# EAGLE board CPC_RAM512K_SN74_v2.01 (EAGLE 6.4)
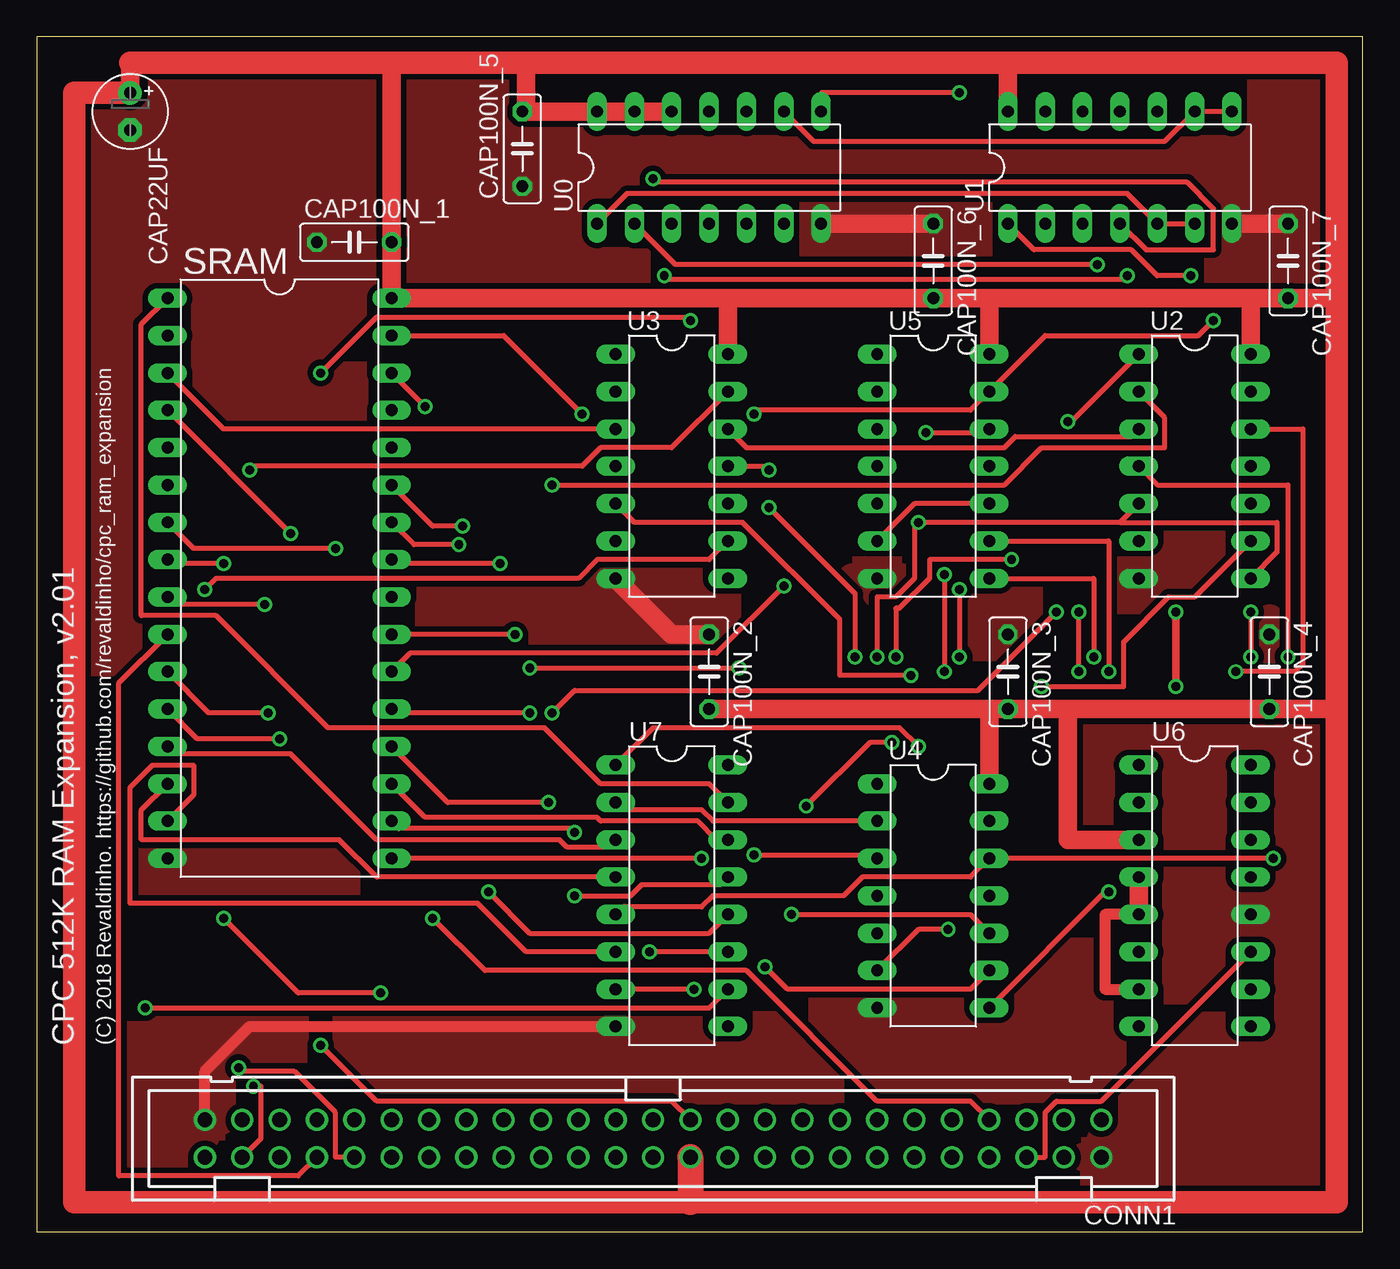
[diagram p0: board, top side]
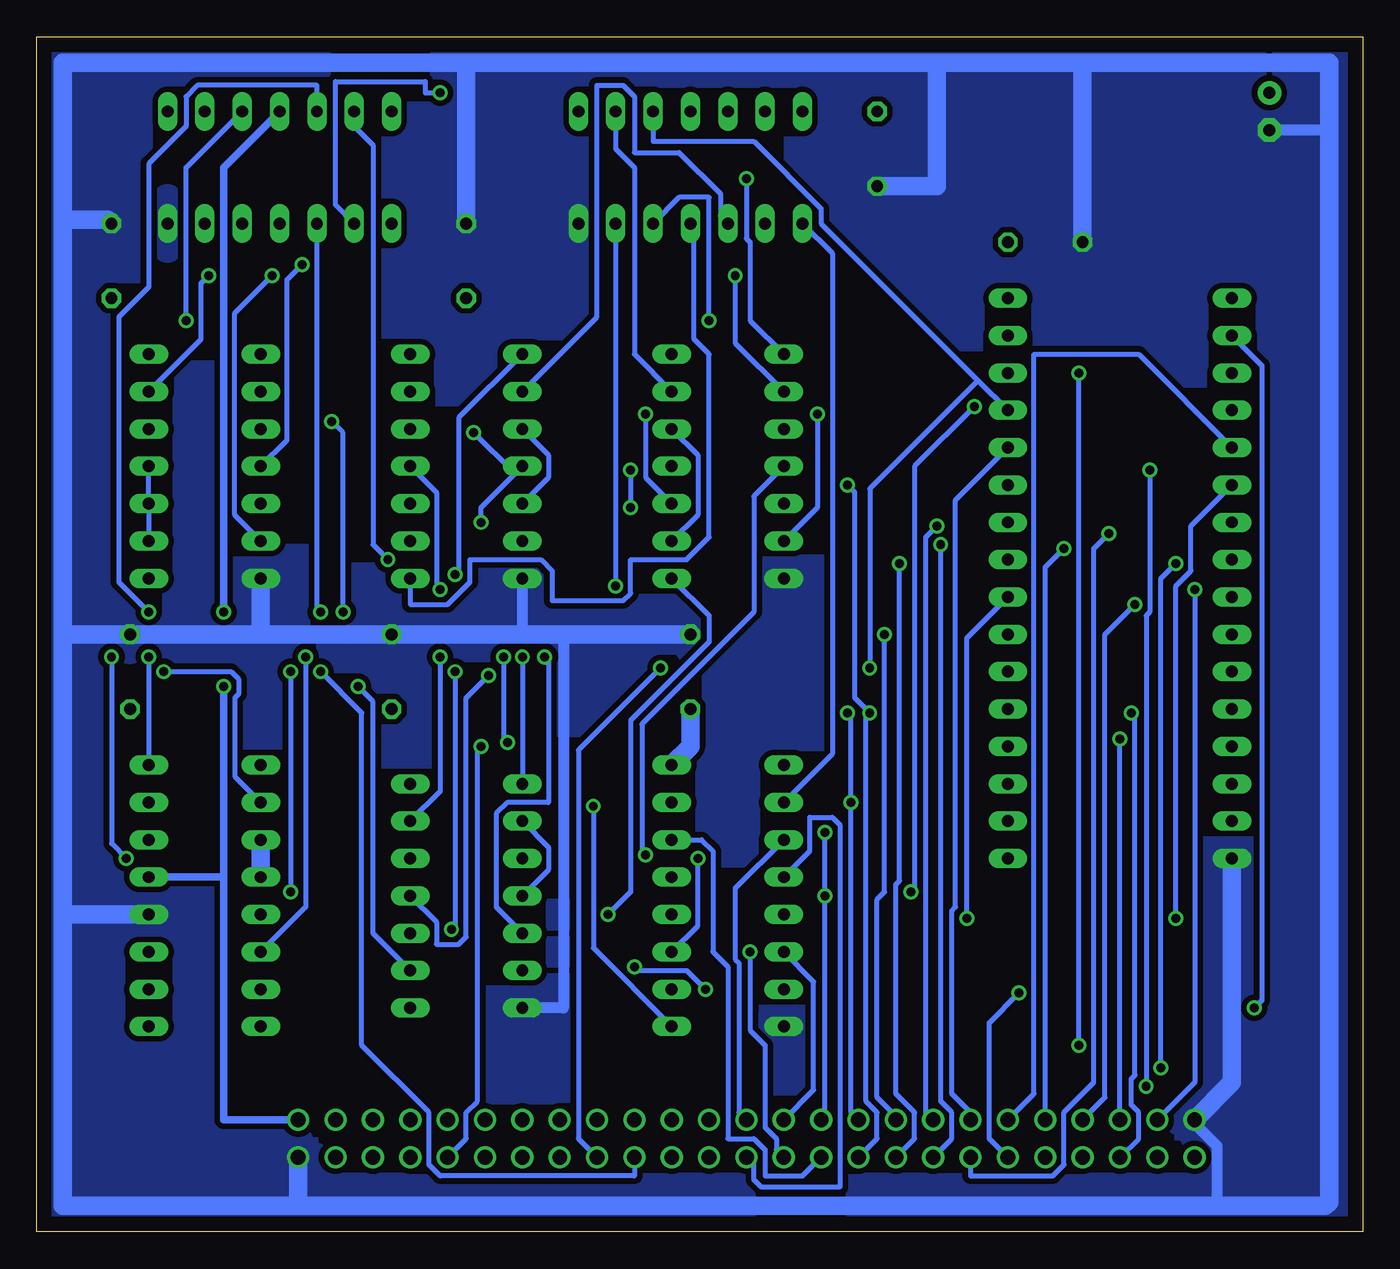
[diagram p1: board, bottom side, seen from below]

Size 90.17 x 81.28 mm. Coordinates in mm from the lower left corner, seen from the top.
Outline: 0,0 90.17,0 90.17,81.28 0,81.28 0,0
Copper layers (1*16): Top 0.035mm / dielectric 1.5mm / Bottom 0.035mm
Design rules "default": minimum track width 10mil, minimum drill 24mil, track to track 8mil, track to pad 8mil, pad to pad 8mil, via to via 8mil, smd to smd 8mil, copper to edge 40mil, drill to drill 8mil, minimum pad ring 10mil, minimum via ring 8mil, stop-mask expansion 4mil, vias tented up to drill 0mil, thermal gap 10mil
Net classes: 0 signal: width 0.356 mm, clearance 0.254 mm; 1 supply: width 0.762 mm, clearance 0.381 mm

## Footprints (pad centres in the part's own frame; a part is rotated, then mirrored left to right if it is on the bottom)
E2,5-5 = drill 0.813 pad 1.6: + -1.27,0 | drill 0.813 pad 1.6 octagon: - 1.27,0
C050-025X075 = drill 0.813 octagon: 1 -2.54,0; 2 2.54,0
PAK100/2500-50 = drill 1 pad 1.422: 1 -30.48,-1.27; 2 -30.48,1.27; 3 -27.94,-1.27; 4 -27.94,1.27; 5 -25.4,-1.27; 6 -25.4,1.27; 7 -22.86,-1.27; 8 -22.86,1.27; 9 -20.32,-1.27; 10 -20.32,1.27; 11 -17.78,-1.27; 12 -17.78,1.27; 13 -15.24,-1.27; 14 -15.24,1.27; 15 -12.7,-1.27; 16 -12.7,1.27; 17 -10.16,-1.27; 18 -10.16,1.27; 19 -7.62,-1.27; 20 -7.62,1.27; 21 -5.08,-1.27; 22 -5.08,1.27; 23 -2.54,-1.27; 24 -2.54,1.27; 25 0,-1.27; 26 0,1.27; 27 2.54,-1.27; 28 2.54,1.27; 29 5.08,-1.27; 30 5.08,1.27; 31 7.62,-1.27; 32 7.62,1.27; 33 10.16,-1.27; 34 10.16,1.27; 35 12.7,-1.27; 36 12.7,1.27; 37 15.24,-1.27; 38 15.24,1.27; 39 17.78,-1.27; 40 17.78,1.27; 41 20.32,-1.27; 42 20.32,1.27; 43 22.86,-1.27; 44 22.86,1.27; 45 25.4,-1.27; 46 25.4,1.27; 47 27.94,-1.27; 48 27.94,1.27; 49 30.48,-1.27; 50 30.48,1.27
DIL32 = drill 0.813 long: 1 -19.05,-7.62; 2 -16.51,-7.62; 3 -13.97,-7.62; 4 -11.43,-7.62; 5 -8.89,-7.62; 6 -6.35,-7.62; 7 -3.81,-7.62; 8 -1.27,-7.62; 9 1.27,-7.62; 10 3.81,-7.62; 11 6.35,-7.62; 12 8.89,-7.62; 13 11.43,-7.62; 14 13.97,-7.62; 15 16.51,-7.62; 16 19.05,-7.62; 17 19.05,7.62; 18 16.51,7.62; 19 13.97,7.62; 20 11.43,7.62; 21 8.89,7.62; 22 6.35,7.62; 23 3.81,7.62; 24 1.27,7.62; 25 -1.27,7.62; 26 -3.81,7.62; 27 -6.35,7.62; 28 -8.89,7.62; 29 -11.43,7.62; 30 -13.97,7.62; 31 -16.51,7.62; 32 -19.05,7.62
DIL14 = drill 0.813 long: 1 -7.62,-3.81; 2 -5.08,-3.81; 3 -2.54,-3.81; 4 0,-3.81; 5 2.54,-3.81; 6 5.08,-3.81; 7 7.62,-3.81; 8 7.62,3.81; 9 5.08,3.81; 10 2.54,3.81; 11 0,3.81; 12 -2.54,3.81; 13 -5.08,3.81; 14 -7.62,3.81
DIL16 = drill 0.813 long: 1 -8.89,-3.81; 2 -6.35,-3.81; 3 -3.81,-3.81; 4 -1.27,-3.81; 5 1.27,-3.81; 6 3.81,-3.81; 7 6.35,-3.81; 8 8.89,-3.81; 9 8.89,3.81; 10 6.35,3.81; 11 3.81,3.81; 12 1.27,3.81; 13 -1.27,3.81; 14 -3.81,3.81; 15 -6.35,3.81; 16 -8.89,3.81

## Placement (x,y rotation side)
CAP22UF  [E2,5-5]  6.35,76.2 270 top
CAP100N_1  [C050-025X075]  21.59,67.31 0 top
CAP100N_2  [C050-025X075]  45.72,38.1 270 top
CAP100N_3  [C050-025X075]  66.04,38.1 270 top
CAP100N_4  [C050-025X075]  83.82,38.1 270 top
CAP100N_5  [C050-025X075]  33.02,73.66 90 top
CAP100N_6  [C050-025X075]  60.96,66.04 270 top
CAP100N_7  [C050-025X075]  85.09,66.04 270 top
CONN1  [PAK100/2500-50]  41.91,6.35 180 top
SRAM  [DIL32]  16.51,44.45 270 top
U0  [DIL14]  45.72,72.39 0 top
U1  [DIL14]  73.66,72.39 0 top
U2  [DIL14]  78.74,52.07 270 top
U3  [DIL14]  43.18,52.07 270 top
U4  [DIL14]  60.96,22.86 270 top
U5  [DIL14]  60.96,52.07 270 top
U6  [DIL16]  78.74,22.86 270 top
U7  [DIL16]  43.18,22.86 270 top

## Library data of the parts
CAP22UF CAP100N_1-CAP100N_7 = resistor
CONN1 = con-3m
SRAM U0 U1-U7 = ic-package

## Nets
A0: CONN1.33 SRAM.23
A1: CONN1.34 SRAM.25
A2: CONN1.35 SRAM.27
A3: CONN1.36 SRAM.26
A4: CONN1.37 SRAM.28
A5: CONN1.38 SRAM.4
A6: CONN1.39 SRAM.5
A7: CONN1.40 SRAM.6
A8: CONN1.41 SRAM.7
A9: CONN1.42 SRAM.8
A10: CONN1.43 SRAM.9
A11: CONN1.44 SRAM.10
A12: CONN1.45 SRAM.12
A13: CONN1.46 SRAM.11
A14: CONN1.47 U2.3 U3.9 U3.12
A15: CONN1.48 U0.9 U1.8 U1.9 U3.13
BUSACK_B: CONN1.13
BUSRESET_B: CONN1.11
BUSRQ_B: CONN1.14
CLK: CONN1.1 U1.11 U6.13
CLKENB_LAT_Q: U1.12 U6.16
CURSOR: CONN1.5
D0: CONN1.25 SRAM.13 U7.3
D1: CONN1.26 SRAM.14 U7.4
D2: CONN1.27 SRAM.15 U7.6
D3: CONN1.28 SRAM.17 U7.11
D4: CONN1.29 SRAM.18 U7.13
D5: CONN1.30 SRAM.19 U7.14
D6: CONN1.31 SRAM.20 U2.1
D7: CONN1.32 SRAM.21 U2.2
EXP_B: CONN1.3
EXTRAM_B: U0.4 U5.8 U6.6
HALT_B: CONN1.17
INT_B: CONN1.16
IOREQ_B: CONN1.20 U1.3
LPEN: CONN1.4
M1_B: CONN1.22
MREQ_B: CONN1.23 U0.5
N14: U2.12 U6.2
N15: U1.1 U2.13
N16: U2.6 U3.2
N17: U1.4 U3.1
N18: U4.13 U5.11
N19: U3.5 U4.11
N20: U3.4 U4.3
N21: U1.10 U3.10 U5.13
N22: U3.8 U4.10
N23: U3.11 U4.5
N24: U0.3 U5.2
N25: U4.6 U5.1
N26: U5.3 U5.5
N27: U2.5 U2.8 U4.1 U5.4 U5.12
N28: U5.6 U5.10
N29: U4.8 U5.9
NMI_B: CONN1.15
NN1: U0.8 U1.2
RAMADRHI0: SRAM.3 U3.3
RAMADRHI1: SRAM.31 U3.6
RAMADRHI2: SRAM.2 U7.10
RAMADRHI3: SRAM.30 U7.12
RAMADRHI4: SRAM.1 U7.15
RAMBLOCK_Q0: U0.1 U1.5 U1.6 U4.2 U4.4 U7.2
RAMBLOCK_Q1: U0.2 U2.4 U4.12 U7.5
RAMBLOCK_Q2: U2.9 U2.10 U2.11 U4.9 U7.7
RAMCS_B: SRAM.22 U0.6
RAMDIS: CONN1.6 U6.11
RAMRD_B: CONN1.7 SRAM.24
RD_B: CONN1.19
READY: CONN1.12
RESET_B: CONN1.10 U7.1
RFSH_B: CONN1.21
ROMDIS: CONN1.8
ROMEN_B: CONN1.9
SOUND: CONN1.50
VDD [supply]: CAP22UF.+ CAP100N_1.2 CAP100N_2.2 CAP100N_3.2 CAP100N_4.2 CAP100N_5.2 CAP100N_6.2 CAP100N_7.2 CONN1.24 SRAM.32 U0.12 U0.13 U0.14 U1.14 U2.14 U3.14 U4.14 U5.14 U6.3 U6.4 U6.5 U6.7 U7.16
VSS [supply]: CAP22UF.- CAP100N_1.1 CAP100N_2.1 CAP100N_3.1 CAP100N_4.1 CAP100N_5.1 CAP100N_6.1 CAP100N_7.1 CONN1.2 CONN1.49 SRAM.16 U0.7 U1.7 U2.7 U3.7 U4.7 U5.7 U6.12 U7.8
WCLK_B: U1.13 U7.9
WR_B: CONN1.18 SRAM.29 U0.10

## Tracks (layer width: path | path; a pad name or v marks a point on that pad's centre or on a via)
A0  (via drill 0.61)
  Top 0.356: v32.51,40.64 SRAM.23
  Bottom 0.356: v32.51,40.64 32.51,23.11 33.02,22.61 33.02,9.14 31.75,7.87 CONN1.33
A1  (via drill 0.61)
  Top 0.356: SRAM.25 24.38,45.47 v31.5,45.47
  Bottom 0.356: v31.5,45.47 31.5,23.88 31.75,23.62 31.75,9.4 30.48,8.13 30.48,6.35 CONN1.34
A2  (via drill 0.61)
  Top 0.356: SRAM.27 26.92,48.01 v28.96,48.01
  Bottom 0.356: v28.96,48.01 29.72,47.24 29.72,8.13 CONN1.35
A3  (via drill 0.61)
  Top 0.356: SRAM.26 25.65,46.74 v28.7,46.74
  Bottom 0.356: v28.7,46.74 28.7,8.89 27.94,8.13 27.94,6.35 CONN1.36
A4
  Bottom 0.356: SRAM.28 27.69,49.78 27.69,22.1 27.94,21.84 27.94,9.4 26.67,8.13 CONN1.37
A5  (via drill 0.61)
  Top 0.356: v17.27,47.5 SRAM.4
  Bottom 0.356: v17.27,47.5 18.29,46.48 18.29,10.16 20.32,8.13 20.32,4.57 21.08,3.81 26.67,3.81 CONN1.38
A6
  Bottom 0.356: SRAM.5 15.24,59.69 22.35,59.69 22.35,9.4 CONN1.39
A7  (via drill 0.61)
  Top 0.356: v12.7,21.34 17.78,16.26 v23.37,16.26
  Bottom 0.356: SRAM.6 11.68,48.01 11.68,44.96 12.7,43.94 v12.7,21.34 | v23.37,16.26 25.4,14.22 25.4,6.35 CONN1.40
A8  (via drill 0.61)
  Top 0.356: SRAM.7 10.67,46.48 v20.32,46.48
  Bottom 0.356: v20.32,46.48 21.59,45.21 CONN1.41
A9  (via drill 0.61)
  Top 0.356: SRAM.8 9.14,45.47 v12.7,45.47 | v13.72,11.18 13.97,10.92 17.53,10.92 20.32,8.13 20.32,5.08 CONN1.42
  Bottom 0.356: v12.7,45.47 13.72,44.45 v13.72,11.18
A10  (via drill 0.61)
  Top 0.356: SRAM.9 9.4,42.67 v15.49,42.67
  Bottom 0.356: v15.49,42.67 17.53,40.64 17.53,9.14 CONN1.43
A11
  Top 0.356: SRAM.10 5.59,37.34 5.59,3.81 17.78,3.81 CONN1.44
A12  (via drill 0.61)
  Top 0.356: SRAM.12 10.92,33.53 v16.51,33.53
  Bottom 0.356: CONN1.45 v16.51,33.53
A13  (via drill 0.61)
  Top 0.356: SRAM.11 11.68,35.31 v15.75,35.31
  Bottom 0.356: v15.75,35.31 15.49,35.05 15.49,10.67 15.75,10.41 15.75,8.64 15.24,8.13 15.24,6.35 CONN1.46
A14  (via drill 0.61)
  Top 0.356: U2.3 74.42,54.1 66.55,54.1 65.79,53.34 48.26,53.34 U3.12 | v11.43,43.69 12.19,44.45 36.83,44.45 38.1,45.72 45.72,45.72 U3.9
  Bottom 0.356: U3.9 45.21,48.77 45.21,52.83 U3.12 | CONN1.47 11.43,10.16 v11.43,43.69
A15  (via drill 0.61)
  Top 0.356: U1.8 U1.9 76.71,74.17 52.83,74.17 U0.9 | CONN1.48 15.24,6.35 15.24,9.91 v14.73,9.91 | v14.48,51.82 14.73,52.07 37.08,52.07 38.35,53.34 43.18,53.34 U3.13
  Bottom 0.356: U3.13 49.53,59.69 49.53,72.39 50.8,73.66 U0.9 | v14.73,9.91 14.73,41.91 14.48,42.16 v14.48,51.82
CLK  (via drill 0.61)
  Top 0.508: v77.47,37.08 v77.47,42.16
  Bottom 0.508: 77.47,24.13 77.47,7.62 CONN1.1 | 77.47,24.13 U6.13 | U1.11 77.47,72.39 v77.47,42.16 | 77.47,24.13 v77.47,37.08
CLKENB_LAT_Q  (via drill 0.61)
  Top 0.356: v82.55,42.16 v82.55,39.12
  Bottom 0.356: v82.55,39.12 U6.16 | v82.55,42.16 84.58,44.2 84.58,62.23 82.55,64.26 82.55,72.64 80.01,75.18 80.01,77.22 79.25,77.98 71.12,77.98 U1.12
D0
  Top 0.356: SRAM.13 9.4,32.51 17.27,32.51 23.11,26.67 35.56,26.67 36.07,26.16 38.86,26.16 U7.3
  Bottom 0.356: CONN1.25 42.42,8.13 42.42,18.29 42.67,18.54 42.67,23.37 U7.3
D1
  Top 0.356: SRAM.14 7.11,28.7 7.11,26.67 20.57,26.67 23.11,24.13 U7.4
  Bottom 0.356: CONN1.26 41.4,4.57 41.4,3.56 40.89,3.05 35.56,3.05 35.56,27.69 36.07,28.19 37.59,28.19 37.59,25.91 U7.4
D2
  Top 0.356: SRAM.15 10.67,29.72 10.67,31.75 7.87,31.75 6.35,30.23 6.35,22.35 29.97,22.35 33.27,19.05 U7.6
  Bottom 0.356: U7.6 37.34,17.02 37.34,9.65 CONN1.27
D3  (via drill 0.61)
  Top 0.356: v45.21,25.4 SRAM.17 | U7.11 v41.66,19.05
  Bottom 0.356: v45.21,25.4 45.21,20.83 U7.11 | CONN1.28 39.88,5.59 39.88,6.35 40.64,7.11 40.64,12.7 41.66,13.72 v41.66,19.05
D4  (via drill 0.61)
  Top 0.356: SRAM.18 24.64,27.43 36.32,27.43 v36.58,27.18 | U7.13 46.48,23.62 41.15,23.62 40.39,22.86 v36.58,22.86
  Bottom 0.356: v36.58,27.18 v36.58,22.86 36.58,7.87 CONN1.29
D5
  Top 0.356: SRAM.19 26.42,28.19 38.1,28.19 38.35,27.94 44.96,27.94 46.23,26.67 U7.14
  Bottom 0.356: CONN1.30 38.1,3.81 40.64,3.81 40.64,5.59 41.4,6.35 43.18,6.35 43.18,18.03 44.2,19.05 44.2,25.91 44.96,26.67 U7.14
D6  (via drill 0.61)
  Top 0.356: SRAM.20 27.94,29.21 v34.8,29.21 | U2.1 70.36,55.12 v70.1,55.12 | v69.34,42.16 64.01,36.83 36.58,36.83 v35.05,35.31
  Bottom 0.356: CONN1.31 34.8,8.13 v34.8,29.21 34.8,35.05 v35.05,35.31 | v70.1,55.12 69.34,54.36 v69.34,42.16
D7  (via drill 0.61)
  Top 0.356: SRAM.21 24.38,35.31 v33.53,35.31 | U2.2 76.71,55.37 76.71,53.34 68.33,53.34 65.79,50.8 v35.05,50.8
  Bottom 0.356: CONN1.32 33.02,6.35 33.02,8.13 33.78,8.89 33.78,35.05 v33.53,35.31 34.54,36.32 34.54,50.29 v35.05,50.8
EXTRAM_B  (via drill 0.61)
  Top 0.356: v71.88,39.12 71.88,44.45 U5.8
  Bottom 0.356: U6.6 71.88,22.1 v71.88,39.12 | U0.4 45.47,68.33 45.47,60.71 44.45,59.69 44.45,47.24 45.97,45.72 49.78,45.72 49.78,43.43 50.29,42.93 55.12,42.93 55.12,44.96 55.88,45.72 60.71,45.72 60.71,44.2 62.23,42.67 64.77,42.67 U5.8
IOREQ_B  (via drill 0.61)
  Top 0.356: v70.87,38.1 v70.87,42.16
  Bottom 0.356: U1.3 71.12,42.42 v70.87,42.16 | v70.87,38.1 68.07,35.31 68.07,12.7 63.5,8.13 63.5,4.57 62.74,3.81 49.53,3.81 CONN1.20
MREQ_B  (via drill 0.61)
  Top 0.356: v44.45,61.98 44.2,62.23 23.11,62.23 v19.3,58.42 | v19.3,12.7 23.11,8.89 43.18,8.89 CONN1.23
  Bottom 0.356: U0.5 46.48,70.36 44.45,70.36 v44.45,61.98 | v19.3,12.7 v19.3,58.42
N14  (via drill 0.61)
  Top 0.356: v81.53,38.1 85.6,38.1 86.11,38.61 86.11,54.61 U2.12
  Bottom 0.356: U6.2 76.71,30.99 76.71,36.32 76.45,36.58 76.45,37.59 76.96,38.1 v81.53,38.1
N15  (via drill 0.61)
  Top 0.356: U1.1 67.82,66.8 74.42,66.8 76.2,65.02 v78.49,65.02
  Bottom 0.356: v78.49,65.02 78.99,64.52 78.99,60.71 U2.13
N16  (via drill 0.61)
  Top 0.356: v42.67,65.02 42.93,64.77 73.91,64.77 v74.17,65.02
  Bottom 0.356: U3.2 42.67,60.45 v42.67,65.02 | v74.17,65.02 76.71,62.48 76.71,48.77 U2.6
N17  (via drill 0.61)
  Top 0.356: v41.91,71.63 42.16,71.37 78.23,71.37 80.01,69.6 80.01,66.8 75.44,66.8 U1.4
  Bottom 0.356: U3.1 41.66,61.98 41.66,67.31 41.91,67.56 v41.91,71.63
N18  (via drill 0.61)
  Top 0.356: v62.74,43.69 v62.74,39.12
  Bottom 0.356: U4.13 62.74,29.97 v62.74,39.12 | v62.74,43.69 62.99,43.94 62.99,50.29 U5.11
N19  (via drill 0.61)
  Top 0.356: U3.5 40.64,48.26 48.01,48.26 54.61,41.66 54.61,37.85 v59.44,37.85
  Bottom 0.356: v59.44,37.85 60.96,36.32 60.96,20.07 61.47,19.56 62.99,19.56 62.99,21.08 U4.11
N20  (via drill 0.61)
  Top 0.356: U4.3 56.9,25.65 v48.77,25.65
  Bottom 0.356: v48.77,25.65 49.02,25.91 49.02,34.54 41.4,42.16 41.4,50.04 U3.4
N21  (via drill 0.61)
  Top 0.356: v48.77,55.63 49.02,55.88 63.5,55.88 U5.13 68.58,60.96 78.99,60.96 v80.01,61.98
  Bottom 0.356: U3.10 48.77,51.31 v48.77,55.63 | U1.10 80.01,72.39 v80.01,61.98
N22  (via drill 0.61)
  Top 0.356: U4.10 63.5,21.59 v51.31,21.59
  Bottom 0.356: v51.31,21.59 49.78,23.11 49.78,34.8 44.45,40.13 44.45,41.91 U3.8
N23  (via drill 0.61)
  Top 0.356: v55.63,39.12 55.63,43.43 v49.78,49.28 | v49.78,51.82 49.53,52.07 U3.11
  Bottom 0.356: U4.5 58.93,22.1 58.93,28.45 58.17,29.21 55.37,29.21 55.37,38.86 v55.63,39.12 | v49.78,51.82 v49.78,49.28
N24
  Bottom 0.356: U0.3 43.69,69.09 43.69,70.61 46.48,73.41 49.53,73.41 49.53,77.22 50.29,77.98 52.07,77.98 52.07,62.23 U5.2
N25  (via drill 0.61)
  Top 0.356: U4.6 59.94,20.57 v61.98,20.57 | v61.72,44.7 v61.72,38.1
  Bottom 0.356: v61.98,20.57 61.72,20.83 v61.72,38.1 | v61.72,44.7 61.47,44.96 61.47,55.37 U5.1
N26
  Bottom 0.356: U5.5 55.37,51.31 55.37,52.83 U5.3
N27  (via drill 0.61)
  Top 0.356: v57.15,39.12 57.15,43.18 58.42,43.18 59.69,44.45 59.69,48.26 v59.94,48.26 73.66,48.26 | U2.5 73.66,48.26 | U2.8 84.33,46.23 84.33,48.26 73.66,48.26 | U5.12 64.52,54.36 v60.45,54.36
  Bottom 0.356: v57.15,39.12 U4.1 | 57.66,51.56 59.94,49.28 v59.94,48.26 | 57.66,51.56 v60.45,54.36 | 57.66,51.56 U5.4
N28
  Top 0.356: U5.6 59.69,49.53 U5.10
N29  (via drill 0.61)
  Top 0.356: U4.8 72.64,23.11 v72.9,23.11 | v72.9,38.1 72.9,46.99 U5.9
  Bottom 0.356: v72.9,38.1 v72.9,23.11
NN1  (via drill 0.61)
  Top 0.356: U0.8 53.34,77.47 v62.74,77.47
  Bottom 0.356: v62.74,77.47 63.75,77.47 63.75,78.23 69.85,78.23 69.85,69.85 U1.2
RAMADRHI0
  Top 0.356: SRAM.3 12.7,54.61 U3.3
RAMADRHI1  (via drill 0.61)
  Top 0.356: v37.08,55.63 31.75,60.96 SRAM.31
  Bottom 0.356: U3.6 37.08,49.28 v37.08,55.63
RAMADRHI2  (via drill 0.61)
  Top 0.356: U7.10 45.72,15.24 v7.37,15.24
  Bottom 0.356: v7.37,15.24 6.86,15.75 6.86,58.93 SRAM.2
RAMADRHI3  (via drill 0.61)
  Top 0.356: U7.12 45.72,20.32 33.53,20.32 v30.73,23.11 | SRAM.30 v26.42,56.13
  Bottom 0.356: v30.73,23.11 30.48,23.37 30.48,52.07 v26.42,56.13
RAMADRHI4
  Top 0.356: SRAM.1 7.11,61.72 7.11,41.91 12.19,41.91 19.81,34.29 34.54,34.29 38.35,30.48 45.72,30.48 U7.15
RAMBLOCK_Q0
  Top 0.356: U7.2 39.88,28.7 45.21,28.7 45.97,27.94 U4.2 | U0.1 40.13,70.61 74.17,70.61 U1.5 U1.6
  Bottom 0.356: U4.4 55.37,24.64 55.37,26.16 U4.2 | U7.2 36.07,32.51 36.07,66.55 U0.1
RAMBLOCK_Q1  (via drill 0.61)
  Top 0.356: U7.5 39.88,22.1 45.21,22.1 45.97,22.86 54.86,22.86 56.13,24.13 63.5,24.13 U4.12 v84.07,25.4 | U0.2 43.43,65.79 v72.14,65.79 | v85.09,39.12 85.09,50.8 76.2,50.8 U2.4
  Bottom 0.356: v72.14,65.79 73.15,64.77 73.15,53.85 U2.4 | v84.07,25.4 85.09,26.42 v85.09,39.12
RAMBLOCK_Q2  (via drill 0.61)
  Top 0.356: v44.7,16.51 U7.7 | v49.53,18.03 51.05,16.51 63.5,16.51 U4.9 | U2.9 78.74,43.18 76.96,43.18 73.91,40.13 73.91,37.08 v68.33,37.08
  Bottom 0.356: U2.9 U2.10 U2.11 | v44.7,16.51 45.97,17.78 49.53,17.78 v49.53,18.03 | v68.33,37.08 67.31,36.07 67.31,20.32 U4.9
RAMCS_B  (via drill 0.61)
  Top 0.356: SRAM.22 25.4,39.37 46.23,39.37 v50.8,43.94
  Bottom 0.356: U0.6 v50.8,43.94
RAMDIS
  Top 0.356: U6.11 72.39,8.89 69.34,8.89 68.58,8.13 68.58,5.08 CONN1.6
RAMRD_B  (via drill 0.61)
  Top 0.356: v26.92,21.34 30.48,17.78 48.26,17.78 57.15,8.89 63.5,8.89 CONN1.7
  Bottom 0.356: SRAM.24 26.92,40.39 v26.92,21.34
RESET_B  (via drill 0.61)
  Top 0.356: U7.1 41.91,34.29 58.67,34.29 v59.94,33.02
  Bottom 0.356: v59.94,33.02 60.2,32.77 60.2,8.89 60.96,8.13 60.96,6.35 CONN1.10
VDD
  Top 0.762: 65.28,30.23 65.02,30.23 U4.14 | U6.7 72.64,16.51 72.64,21.59 U6.5 | 70.1,35.05 70.1,35.56 | 70.1,27.18 70.1,26.67
  Top 1.27: 6.35,79.5 CAP22UF.+ | 24.13,79.5 CAP100N_1.2 SRAM.32 46.99,63.5 | CAP100N_5.2 33.27,76.2 | 33.27,76.2 33.27,79.5 | 33.27,76.2 U0.14 U0.13 U0.12 | U1.14 66.04,79.5 | 82.55,63.5 CAP100N_7.2 88.39,63.5 | 82.55,63.5 64.77,63.5 | 64.77,63.5 CAP100N_6.2 46.99,63.5 | CAP100N_2.2 64.77,35.56 | 64.77,35.56 CAP100N_3.2 70.1,35.56 CAP100N_4.2 88.39,35.56 | 46.99,63.5 U3.14 | 64.77,35.56 U4.14 | 64.77,63.5 U5.14 | 82.55,63.5 U2.14 | 70.1,35.31 70.1,35.05 70.1,27.18 70.1,26.92 | 70.1,26.67 U6.3 | U6.5 U6.4
  Top 1.524: CAP22UF.+ 2.54,77.47 2.54,2.03 44.45,2.03 88.39,2.03 88.39,35.56 88.39,79.5 66.04,79.5 33.27,79.5 24.13,79.5 6.35,79.5
  Top 1.778: CONN1.24 44.45,2.03
  Bottom 1.27: U7.16 45.72,33.02 CAP100N_2.2 | U6.4 U6.3
VSS
  Top 0.762: U7.8 14.48,13.97 11.43,10.92 CONN1.49
  Top 1.27: CAP100N_6.1 U0.7 | U3.7 43.18,40.64 CAP100N_2.1 | CAP100N_7.1 U1.7
  Bottom 0.762: U4.7 54.36,15.24 54.36,40.64 | 57.15,40.64 U5.7 | 2.29,74.93 CAP22UF.- | 9.91,1.78 9.91,5.84 11.18,7.11 CONN1.49
  Bottom 1.27: CONN1.2 72.39,1.78 | 72.39,1.78 88.39,1.78 88.39,21.59 | 88.39,21.59 88.39,40.64 | 88.39,40.64 88.39,68.83 | 88.39,68.83 88.39,79.5 60.96,79.5 | 60.96,79.5 28.96,79.5 | 28.96,79.5 19.05,79.5 | 19.05,79.5 2.29,79.5 2.29,74.93 2.29,2.03 2.54,1.78 9.91,1.78 72.39,1.78 | CONN1.49 8.89,10.16 SRAM.16 | CAP100N_2.1 54.36,40.64 57.15,40.64 CAP100N_3.1 74.93,40.64 | 74.93,40.64 CAP100N_4.1 88.39,40.64 | CAP100N_7.1 85.34,68.83 88.39,68.83 | CAP100N_1.1 19.05,79.5 | 88.39,21.59 U6.12 | CAP100N_5.1 28.96,71.12 28.96,79.5 | 74.93,40.64 U2.7 | 60.96,79.5 CAP100N_6.1
  pour Top: 0,0 0,81.28 90.17,81.28 90.17,0
  pour Bottom: 0,0 0,81.28 90.17,81.28 90.17,0
WCLK_B  (via drill 0.61)
  Top 0.356: v52.32,28.96 56.64,33.27 v58.17,33.27 | v58.42,39.12 58.42,42.42 58.67,42.42 60.71,44.45 60.71,45.72 v66.29,45.72
  Bottom 0.356: U7.9 52.32,19.3 v52.32,28.96 | v58.17,33.27 58.42,33.53 v58.42,39.12 | v66.29,45.72 67.31,46.74 67.31,73.91 68.58,75.18 U1.13
WR_B  (via drill 0.61)
  Top 0.356: v33.53,38.35 v47.75,38.35
  Bottom 0.356: 26.16,57.91 36.83,68.58 36.83,69.6 41.4,74.17 48.26,74.17 U0.10 | 26.16,57.91 SRAM.29 | CONN1.18 53.34,6.35 53.34,32.77 v47.75,38.35 | v33.53,38.35 33.53,50.55 26.16,57.91

## Text on the board
tPlace: CPC 512K RAM Expansion, v2.01 | (C) 2018 Revaldinho. https://github.com/revaldinho/cpc_ram_expansion